# Altium PCB 24RC.PcbDoc
Units mm, origin at the board's own origin, x right, y up, seen from the top; angles counter-clockwise.
Board outline 50 x 120 mm, 2 copper layers (Top Layer, Bottom Layer); 168 components, 0 nets, 336 pads, 96 vias.
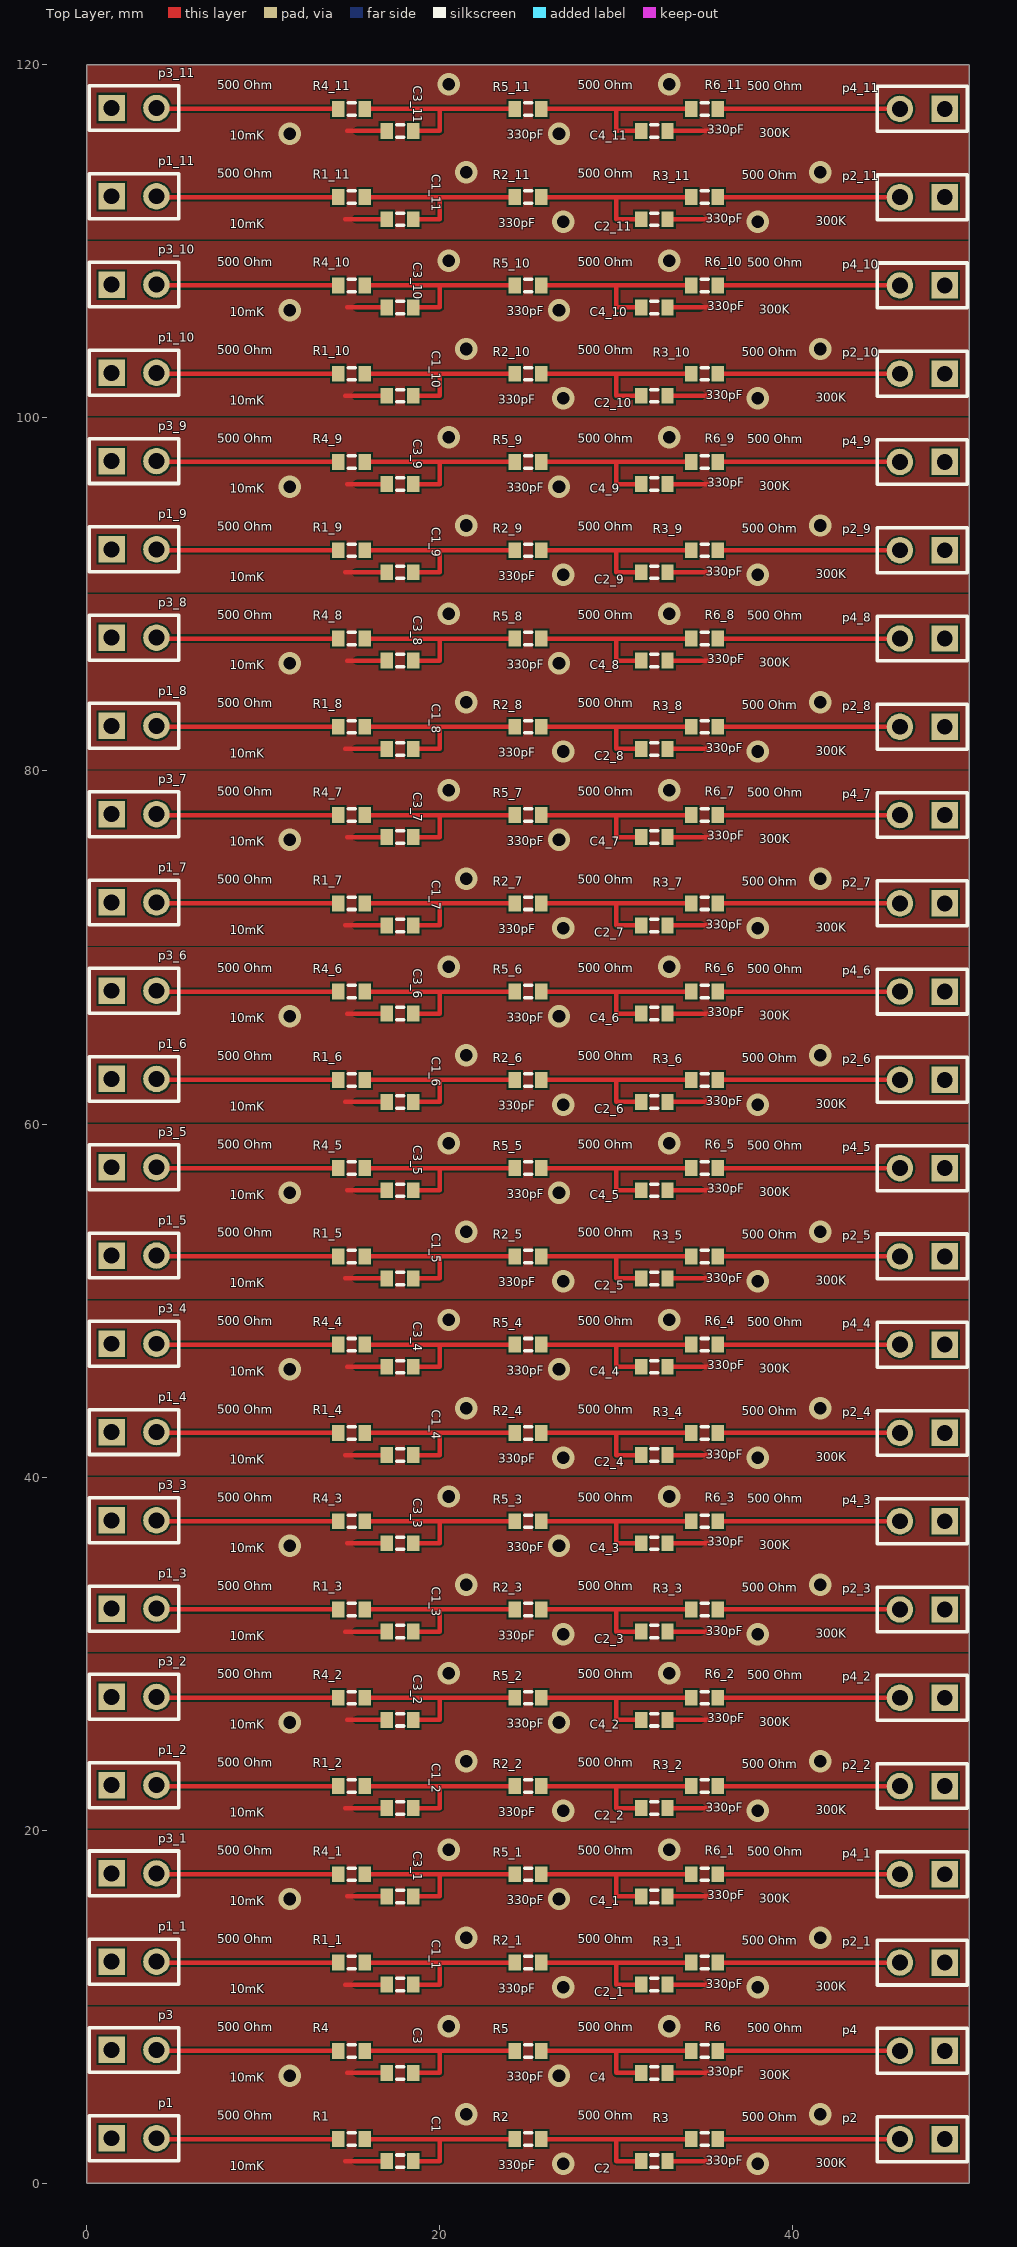
[diagram p0: Top Layer view]
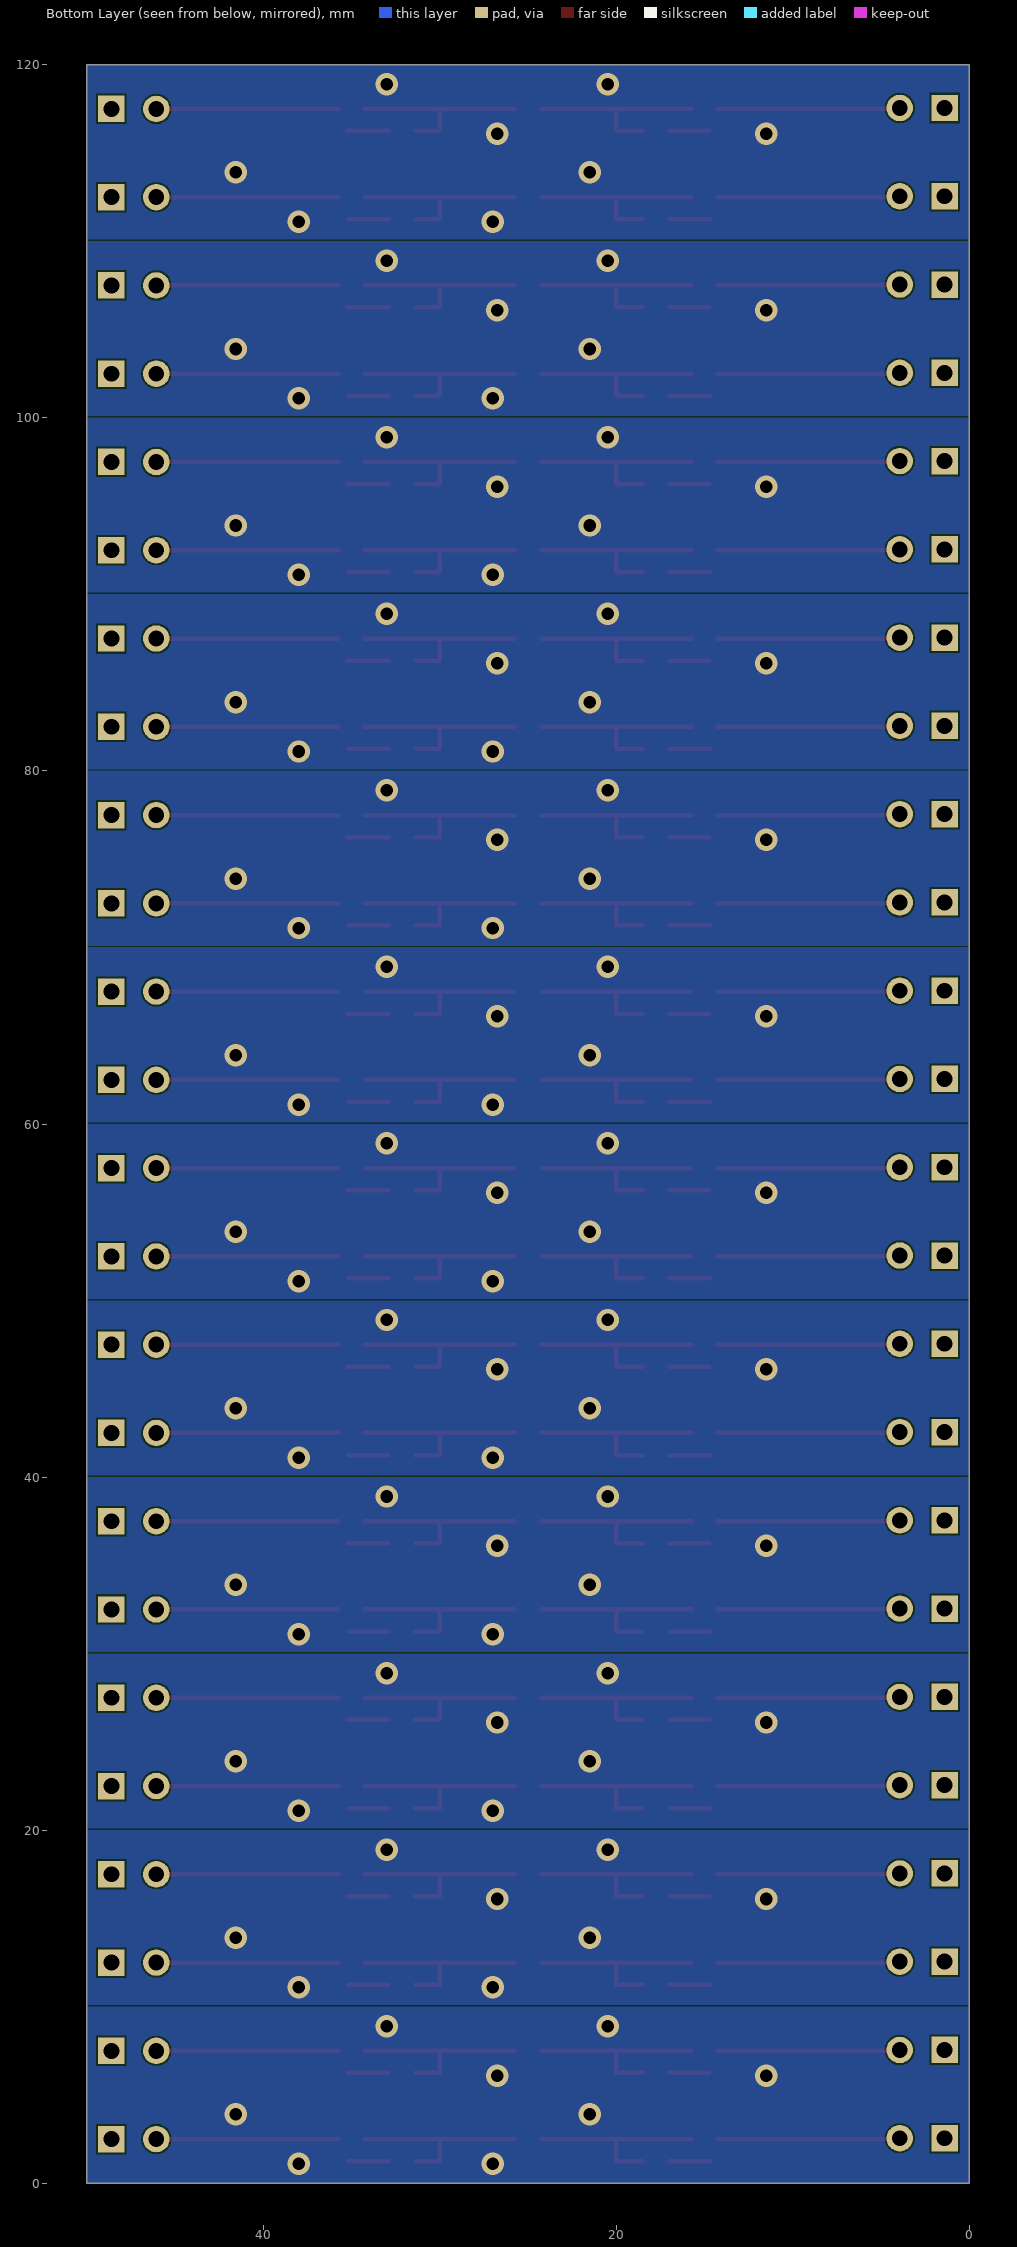
[diagram p1: Bottom Layer view, seen from below]

## Layer stack, top to bottom
Top Solder: solder mask 0.0102, Solder Resist, Dk 3.5
Top Layer: signal copper 0.0356
Dielectric 1: dielectric 0.32, FR-4, Dk 4.8
Bottom Layer: signal copper 0.0356
Bottom Solder: solder mask 0.0102, Solder Resist, Dk 3.5

## Board outline
0,0 0,120 50,120 50,0

## Design rules (kind name [scope] priority, off if disabled: settings)
Clearance "Stitching No Net" [IsStitchingVia and InNet('No Net') vs (IsVia and (Not IsStitchingVia)) Or IsPad] p1: gap=0.127 ignorepadtopadclearanceinfootprint=FALSE
Clearance [All] p2: gap=0.1 ignorepadtopadclearanceinfootprint=FALSE
PolygonConnect [All] p1: connectstyle=Relief reliefconductorwidth=0.254 reliefentries=4 polygonreliefangle="90 Angle" airgapwidth=0.254
RoutingVias [All] p1: holewidth=0.711 width=1.27 viastyle="Through Hole" minholewidth=0.711 minwidth=1.27 maxholewidth=0.711 maxwidth=1.27
SolderMaskExpansion [All] p1: expansion=0.102
Width [All] p1: maxlimit=0.254 minlimit=0.254 preferedwidth=0.254
30 further rules are at their usual default settings.

## Components (designator, comment, footprint, x,y, rotation, side; value= is the part's Value field where it differs from the comment)
C1 "Comment" J1-0603 17.75,1.25 r180 top
C1_1 "Comment" J1-0603 17.75,11.25 r180 top
C1_2 "Comment" J1-0603 17.75,21.25 r180 top
C1_3 "Comment" J1-0603 17.75,31.25 r180 top
C1_4 "Comment" J1-0603 17.75,41.25 r180 top
C1_5 "Comment" J1-0603 17.75,51.25 r180 top
C1_6 "Comment" J1-0603 17.75,61.25 r180 top
C1_7 "Comment" J1-0603 17.75,71.25 r180 top
C1_8 "Comment" J1-0603 17.75,81.25 r180 top
C1_9 "Comment" J1-0603 17.75,91.25 r180 top
C1_10 "Comment" J1-0603 17.75,101.25 r180 top
C1_11 "Comment" J1-0603 17.75,111.25 r180 top
C2 "Comment" J1-0603 32.15,1.25 r0 top
C2_1 "Comment" J1-0603 32.15,11.25 r0 top
C2_2 "Comment" J1-0603 32.15,21.25 r0 top
C2_3 "Comment" J1-0603 32.15,31.25 r0 top
C2_4 "Comment" J1-0603 32.15,41.25 r0 top
C2_5 "Comment" J1-0603 32.15,51.25 r0 top
C2_6 "Comment" J1-0603 32.15,61.25 r0 top
C2_7 "Comment" J1-0603 32.15,71.25 r0 top
C2_8 "Comment" J1-0603 32.15,81.25 r0 top
C2_9 "Comment" J1-0603 32.15,91.25 r0 top
C2_10 "Comment" J1-0603 32.15,101.25 r0 top
C2_11 "Comment" J1-0603 32.15,111.25 r0 top
C3 "Comment" J1-0603 17.75,6.25 r180 top
C3_1 "Comment" J1-0603 17.75,16.25 r180 top
C3_2 "Comment" J1-0603 17.75,26.25 r180 top
C3_3 "Comment" J1-0603 17.75,36.25 r180 top
C3_4 "Comment" J1-0603 17.75,46.25 r180 top
C3_5 "Comment" J1-0603 17.75,56.25 r180 top
C3_6 "Comment" J1-0603 17.75,66.25 r180 top
C3_7 "Comment" J1-0603 17.75,76.25 r180 top
C3_8 "Comment" J1-0603 17.75,86.25 r180 top
C3_9 "Comment" J1-0603 17.75,96.25 r180 top
C3_10 "Comment" J1-0603 17.75,106.25 r180 top
C3_11 "Comment" J1-0603 17.75,116.25 r180 top
C4 "Comment" J1-0603 32.15,6.25 r0 top
C4_1 "Comment" J1-0603 32.15,16.25 r0 top
C4_2 "Comment" J1-0603 32.15,26.25 r0 top
C4_3 "Comment" J1-0603 32.15,36.25 r0 top
C4_4 "Comment" J1-0603 32.15,46.25 r0 top
C4_5 "Comment" J1-0603 32.15,56.25 r0 top
C4_6 "Comment" J1-0603 32.15,66.25 r0 top
C4_7 "Comment" J1-0603 32.15,76.25 r0 top
C4_8 "Comment" J1-0603 32.15,86.25 r0 top
C4_9 "Comment" J1-0603 32.15,96.25 r0 top
C4_10 "Comment" J1-0603 32.15,106.25 r0 top
C4_11 "Comment" J1-0603 32.15,116.25 r0 top
p1 "Comment" HDR1X2 1.41,2.55 r0 top
p1_1 "Comment" HDR1X2 1.41,12.55 r0 top
p1_2 "Comment" HDR1X2 1.41,22.55 r0 top
p1_3 "Comment" HDR1X2 1.41,32.55 r0 top
p1_4 "Comment" HDR1X2 1.41,42.55 r0 top
p1_5 "Comment" HDR1X2 1.41,52.55 r0 top
p1_6 "Comment" HDR1X2 1.41,62.55 r0 top
p1_7 "Comment" HDR1X2 1.41,72.55 r0 top
p1_8 "Comment" HDR1X2 1.41,82.55 r0 top
p1_9 "Comment" HDR1X2 1.41,92.55 r0 top
p1_10 "Comment" HDR1X2 1.41,102.55 r0 top
p1_11 "Comment" HDR1X2 1.41,112.55 r0 top
p2 "Comment" HDR1X2 48.6,2.5 r180 top
p2_1 "Comment" HDR1X2 48.6,12.5 r180 top
p2_2 "Comment" HDR1X2 48.6,22.5 r180 top
p2_3 "Comment" HDR1X2 48.6,32.5 r180 top
p2_4 "Comment" HDR1X2 48.6,42.5 r180 top
p2_5 "Comment" HDR1X2 48.6,52.5 r180 top
p2_6 "Comment" HDR1X2 48.6,62.5 r180 top
p2_7 "Comment" HDR1X2 48.6,72.5 r180 top
p2_8 "Comment" HDR1X2 48.6,82.5 r180 top
p2_9 "Comment" HDR1X2 48.6,92.5 r180 top
p2_10 "Comment" HDR1X2 48.6,102.5 r180 top
p2_11 "Comment" HDR1X2 48.6,112.5 r180 top
p3 "Comment" HDR1X2 1.41,7.55 r0 top
p3_1 "Comment" HDR1X2 1.41,17.55 r0 top
p3_2 "Comment" HDR1X2 1.41,27.55 r0 top
p3_3 "Comment" HDR1X2 1.41,37.55 r0 top
p3_4 "Comment" HDR1X2 1.41,47.55 r0 top
p3_5 "Comment" HDR1X2 1.41,57.55 r0 top
p3_6 "Comment" HDR1X2 1.41,67.55 r0 top
p3_7 "Comment" HDR1X2 1.41,77.55 r0 top
p3_8 "Comment" HDR1X2 1.41,87.55 r0 top
p3_9 "Comment" HDR1X2 1.41,97.55 r0 top
p3_10 "Comment" HDR1X2 1.41,107.55 r0 top
p3_11 "Comment" HDR1X2 1.41,117.55 r0 top
p4 "Comment" HDR1X2 48.6,7.5 r180 top
p4_1 "Comment" HDR1X2 48.6,17.5 r180 top
p4_2 "Comment" HDR1X2 48.6,27.5 r180 top
p4_3 "Comment" HDR1X2 48.6,37.5 r180 top
p4_4 "Comment" HDR1X2 48.6,47.5 r180 top
p4_5 "Comment" HDR1X2 48.6,57.5 r180 top
p4_6 "Comment" HDR1X2 48.6,67.5 r180 top
p4_7 "Comment" HDR1X2 48.6,77.5 r180 top
p4_8 "Comment" HDR1X2 48.6,87.5 r180 top
p4_9 "Comment" HDR1X2 48.6,97.5 r180 top
p4_10 "Comment" HDR1X2 48.6,107.5 r180 top
p4_11 "Comment" HDR1X2 48.6,117.5 r180 top
R1 "Comment" J1-0603 15,2.5 r0 top
R1_1 "Comment" J1-0603 15,12.5 r0 top
R1_2 "Comment" J1-0603 15,22.5 r0 top
R1_3 "Comment" J1-0603 15,32.5 r0 top
R1_4 "Comment" J1-0603 15,42.5 r0 top
R1_5 "Comment" J1-0603 15,52.5 r0 top
R1_6 "Comment" J1-0603 15,62.5 r0 top
R1_7 "Comment" J1-0603 15,72.5 r0 top
R1_8 "Comment" J1-0603 15,82.5 r0 top
R1_9 "Comment" J1-0603 15,92.5 r0 top
R1_10 "Comment" J1-0603 15,102.5 r0 top
R1_11 "Comment" J1-0603 15,112.5 r0 top
R2 "Comment" J1-0603 25,2.5 r0 top
R2_1 "Comment" J1-0603 25,12.5 r0 top
R2_2 "Comment" J1-0603 25,22.5 r0 top
R2_3 "Comment" J1-0603 25,32.5 r0 top
R2_4 "Comment" J1-0603 25,42.5 r0 top
R2_5 "Comment" J1-0603 25,52.5 r0 top
R2_6 "Comment" J1-0603 25,62.5 r0 top
R2_7 "Comment" J1-0603 25,72.5 r0 top
R2_8 "Comment" J1-0603 25,82.5 r0 top
R2_9 "Comment" J1-0603 25,92.5 r0 top
R2_10 "Comment" J1-0603 25,102.5 r0 top
R2_11 "Comment" J1-0603 25,112.5 r0 top
R3 "Comment" J1-0603 35,2.5 r0 top
R3_1 "Comment" J1-0603 35,12.5 r0 top
R3_2 "Comment" J1-0603 35,22.5 r0 top
R3_3 "Comment" J1-0603 35,32.5 r0 top
R3_4 "Comment" J1-0603 35,42.5 r0 top
R3_5 "Comment" J1-0603 35,52.5 r0 top
R3_6 "Comment" J1-0603 35,62.5 r0 top
R3_7 "Comment" J1-0603 35,72.5 r0 top
R3_8 "Comment" J1-0603 35,82.5 r0 top
R3_9 "Comment" J1-0603 35,92.5 r0 top
R3_10 "Comment" J1-0603 35,102.5 r0 top
R3_11 "Comment" J1-0603 35,112.5 r0 top
R4 "Comment" J1-0603 15,7.5 r0 top
R4_1 "Comment" J1-0603 15,17.5 r0 top
R4_2 "Comment" J1-0603 15,27.5 r0 top
R4_3 "Comment" J1-0603 15,37.5 r0 top
R4_4 "Comment" J1-0603 15,47.5 r0 top
R4_5 "Comment" J1-0603 15,57.5 r0 top
R4_6 "Comment" J1-0603 15,67.5 r0 top
R4_7 "Comment" J1-0603 15,77.5 r0 top
R4_8 "Comment" J1-0603 15,87.5 r0 top
R4_9 "Comment" J1-0603 15,97.5 r0 top
R4_10 "Comment" J1-0603 15,107.5 r0 top
R4_11 "Comment" J1-0603 15,117.5 r0 top
R5 "Comment" J1-0603 25,7.5 r0 top
R5_1 "Comment" J1-0603 25,17.5 r0 top
R5_2 "Comment" J1-0603 25,27.5 r0 top
R5_3 "Comment" J1-0603 25,37.5 r0 top
R5_4 "Comment" J1-0603 25,47.5 r0 top
R5_5 "Comment" J1-0603 25,57.5 r0 top
R5_6 "Comment" J1-0603 25,67.5 r0 top
R5_7 "Comment" J1-0603 25,77.5 r0 top
R5_8 "Comment" J1-0603 25,87.5 r0 top
R5_9 "Comment" J1-0603 25,97.5 r0 top
R5_10 "Comment" J1-0603 25,107.5 r0 top
R5_11 "Comment" J1-0603 25,117.5 r0 top
R6 "Comment" J1-0603 35,7.5 r0 top
R6_1 "Comment" J1-0603 35,17.5 r0 top
R6_2 "Comment" J1-0603 35,27.5 r0 top
R6_3 "Comment" J1-0603 35,37.5 r0 top
R6_4 "Comment" J1-0603 35,47.5 r0 top
R6_5 "Comment" J1-0603 35,57.5 r0 top
R6_6 "Comment" J1-0603 35,67.5 r0 top
R6_7 "Comment" J1-0603 35,77.5 r0 top
R6_8 "Comment" J1-0603 35,87.5 r0 top
R6_9 "Comment" J1-0603 35,97.5 r0 top
R6_10 "Comment" J1-0603 35,107.5 r0 top
R6_11 "Comment" J1-0603 35,117.5 r0 top

## Footprints (in the part's own frame and the unit in brackets; to place one, negate y for a bottom-side part, rotate by r counter-clockwise, add the part's x,y. Pads: shape width x height; smd on the part's side, far side on the other; paste and mask are expansions set on the pad)
HDR1X2 [mm] "Connector; Header; 2 Position"
  rect 1.5x1.5 hole 0.9: 1(0,0)
  round 1.5 hole 0.9: 2(2.54,0)
  silkscreen extent -1.27,-1.27 3.81,1.27
J1-0603 [mm] "Chip Resistor, Body 1.6x0.8mm, IPC High Density"
  rect 0.7x0.9 smd: 1(-0.75,0) 2(0.75,0)
  silkscreen extent -0.2,-0.35 0.2,0.35, body extent -0.85,-0.48 0.85,0.48, height 0.9

## Via types
v1: diameter 1.27, hole 0.711, Top Layer to Bottom Layer, 96 vias

## Nets (pads, with @x,y where several pads share a name; then routed paths per layer and width w, separated by ;. In a path a pad name is that pad's centre, name@x,y a point inside that pad or via, vN(x,y) a via of type N, cw(c..) or ccw(c..) an arc to the next point about the centre after c; other vN are vias at no path point)
pads on no net: C1.1 C1.2 C1_1.1 C1_1.2 C1_2.1 C1_2.2 C1_3.1 C1_3.2 C1_4.1 C1_4.2 C1_5.1 C1_5.2 C1_6.1 C1_6.2 C1_7.1 C1_7.2 C1_8.1 C1_8.2 C1_9.1 C1_9.2 C1_10.1 C1_10.2 C1_11.1 C1_11.2 C2.1 C2.2 C2_1.1 C2_1.2 C2_2.1 C2_2.2 C2_3.1 C2_3.2 C2_4.1 C2_4.2 C2_5.1 C2_5.2 C2_6.1 C2_6.2 C2_7.1 C2_7.2 C2_8.1 C2_8.2 C2_9.1 C2_9.2 C2_10.1 C2_10.2 C2_11.1 C2_11.2 C3.1 C3.2 C3_1.1 C3_1.2 C3_2.1 C3_2.2 C3_3.1 C3_3.2 C3_4.1 C3_4.2 C3_5.1 C3_5.2 C3_6.1 C3_6.2 C3_7.1 C3_7.2 C3_8.1 C3_8.2 C3_9.1 C3_9.2 C3_10.1 C3_10.2 C3_11.1 C3_11.2 C4.1 C4.2 C4_1.1 C4_1.2 C4_2.1 C4_2.2 C4_3.1 C4_3.2 C4_4.1 C4_4.2 C4_5.1 C4_5.2 C4_6.1 C4_6.2 C4_7.1 C4_7.2 C4_8.1 C4_8.2 C4_9.1 C4_9.2 C4_10.1 C4_10.2 C4_11.1 C4_11.2 p1.1 p1.2 p1_1.1 p1_1.2 p1_2.1 p1_2.2 p1_3.1 p1_3.2 p1_4.1 p1_4.2 p1_5.1 p1_5.2 p1_6.1 p1_6.2 p1_7.1 p1_7.2 p1_8.1 p1_8.2 p1_9.1 p1_9.2 p1_10.1 p1_10.2 p1_11.1 p1_11.2 p2.1 p2.2 p2_1.1 p2_1.2 p2_2.1 p2_2.2 p2_3.1 p2_3.2 p2_4.1 p2_4.2 p2_5.1 p2_5.2 p2_6.1 p2_6.2 p2_7.1 p2_7.2 p2_8.1 p2_8.2 p2_9.1 p2_9.2 p2_10.1 p2_10.2 p2_11.1 p2_11.2 p3.1 p3.2 p3_1.1 p3_1.2 p3_2.1 p3_2.2 p3_3.1 p3_3.2 p3_4.1 p3_4.2 p3_5.1 p3_5.2 p3_6.1 p3_6.2 p3_7.1 p3_7.2 p3_8.1 p3_8.2 p3_9.1 p3_9.2 p3_10.1 p3_10.2 p3_11.1 p3_11.2 p4.1 p4.2 p4_1.1 p4_1.2 p4_2.1 p4_2.2 p4_3.1 p4_3.2 p4_4.1 p4_4.2 p4_5.1 p4_5.2 p4_6.1 p4_6.2 p4_7.1 p4_7.2 p4_8.1 p4_8.2 p4_9.1 p4_9.2 p4_10.1 p4_10.2 p4_11.1 p4_11.2 R1.1 R1.2 R1_1.1 R1_1.2 R1_2.1 R1_2.2 R1_3.1 R1_3.2 R1_4.1 R1_4.2 R1_5.1 R1_5.2 R1_6.1 R1_6.2 R1_7.1 R1_7.2 R1_8.1 R1_8.2 R1_9.1 R1_9.2 R1_10.1 R1_10.2 R1_11.1 R1_11.2 R2.1 R2.2 R2_1.1 R2_1.2 R2_2.1 R2_2.2 R2_3.1 R2_3.2 R2_4.1 R2_4.2 R2_5.1 R2_5.2 R2_6.1 R2_6.2 R2_7.1 R2_7.2 R2_8.1 R2_8.2 R2_9.1 R2_9.2 R2_10.1 R2_10.2 R2_11.1 R2_11.2 R3.1 R3.2 R3_1.1 R3_1.2 R3_2.1 R3_2.2 R3_3.1 R3_3.2 R3_4.1 R3_4.2 R3_5.1 R3_5.2 R3_6.1 R3_6.2 R3_7.1 R3_7.2 R3_8.1 R3_8.2 R3_9.1 R3_9.2 R3_10.1 R3_10.2 R3_11.1 R3_11.2 R4.1 R4.2 R4_1.1 R4_1.2 R4_2.1 R4_2.2 R4_3.1 R4_3.2 R4_4.1 R4_4.2 R4_5.1 R4_5.2 R4_6.1 R4_6.2 R4_7.1 R4_7.2 R4_8.1 R4_8.2 R4_9.1 R4_9.2 R4_10.1 R4_10.2 R4_11.1 R4_11.2 R5.1 R5.2 R5_1.1 R5_1.2 R5_2.1 R5_2.2 R5_3.1 R5_3.2 R5_4.1 R5_4.2 R5_5.1 R5_5.2 R5_6.1 R5_6.2 R5_7.1 R5_7.2 R5_8.1 R5_8.2 R5_9.1 R5_9.2 R5_10.1 R5_10.2 R5_11.1 R5_11.2 R6.1 R6.2 R6_1.1 R6_1.2 R6_2.1 R6_2.2 R6_3.1 R6_3.2 R6_4.1 R6_4.2 R6_5.1 R6_5.2 R6_6.1 R6_6.2 R6_7.1 R6_7.2 R6_8.1 R6_8.2 R6_9.1 R6_9.2 R6_10.1 R6_10.2 R6_11.1 R6_11.2
copper on no net: | length 1146.8
  Top Layer w0.254: 4.05,2.5 14.3,2.5 ; 4.05,7.5 14.3,7.5 ; 4.05,12.5 14.3,12.5 ; 4.05,17.5 14.3,17.5 ; 4.05,22.5 14.3,22.5 ; 4.05,27.5 14.3,27.5 ; 4.05,32.5 14.3,32.5 ; 4.05,37.5 14.3,37.5 ; 4.05,42.5 14.3,42.5 ; 4.05,47.5 14.3,47.5 ; 4.05,52.5 14.3,52.5 ; 4.05,57.5 14.3,57.5 ; 4.05,62.5 14.3,62.5 ; 4.05,67.5 14.3,67.5 ; 4.05,72.5 14.3,72.5 ; 4.05,77.5 14.3,77.5 ; 4.05,82.5 14.3,82.5 ; 4.05,87.5 14.3,87.5 ; 4.05,92.5 14.3,92.5 ; 4.05,97.5 14.3,97.5 ; 4.05,102.5 14.3,102.5 ; 4.05,107.5 14.3,107.5 ; 4.05,112.5 14.3,112.5 ; 4.05,117.5 14.3,117.5 ; 14.65,1.25 15.25,1.25 15.75,1.25 16.2,1.25 17,1.25 ; 14.65,11.25 15.25,11.25 15.75,11.25 16.2,11.25 17,11.25 ; 14.65,21.25 15.25,21.25 15.75,21.25 16.2,21.25 17,21.25 ; 14.65,31.25 15.25,31.25 15.75,31.25 16.2,31.25 17,31.25 ; 14.65,41.25 15.25,41.25 15.75,41.25 16.2,41.25 17,41.25 ; 14.65,51.25 15.25,51.25 15.75,51.25 16.2,51.25 17,51.25 ; 14.65,61.25 15.25,61.25 15.75,61.25 16.2,61.25 17,61.25 ; 14.65,71.25 15.25,71.25 15.75,71.25 16.2,71.25 17,71.25 ; 14.65,81.25 15.25,81.25 15.75,81.25 16.2,81.25 17,81.25 ; 14.65,91.25 15.25,91.25 15.75,91.25 16.2,91.25 17,91.25 ; 14.65,101.25 15.25,101.25 15.75,101.25 16.2,101.25 17,101.25 ; 14.65,111.25 15.25,111.25 15.75,111.25 16.2,111.25 17,111.25 ; 14.75,6.25 15.3,6.25 15.7,6.25 16.2,6.25 17,6.25 ; 14.75,16.25 15.3,16.25 15.7,16.25 16.2,16.25 17,16.25 ; 14.75,26.25 15.3,26.25 15.7,26.25 16.2,26.25 17,26.25 ; 14.75,36.25 15.3,36.25 15.7,36.25 16.2,36.25 17,36.25 ; 14.75,46.25 15.3,46.25 15.7,46.25 16.2,46.25 17,46.25 ; 14.75,56.25 15.3,56.25 15.7,56.25 16.2,56.25 17,56.25 ; 14.75,66.25 15.3,66.25 15.7,66.25 16.2,66.25 17,66.25 ; 14.75,76.25 15.3,76.25 15.7,76.25 16.2,76.25 17,76.25 ; 14.75,86.25 15.3,86.25 15.7,86.25 16.2,86.25 17,86.25 ; 14.75,96.25 15.3,96.25 15.7,96.25 16.2,96.25 17,96.25 ; 14.75,106.25 15.3,106.25 15.7,106.25 16.2,106.25 17,106.25 ; 14.75,116.25 15.3,116.25 15.7,116.25 16.2,116.25 17,116.25 ; 15.75,2.5 24.25,2.5 ; 15.75,7.5 24.25,7.5 ; 15.75,12.5 24.25,12.5 ; 15.75,17.5 24.25,17.5 ; 15.75,22.5 24.25,22.5 ; 15.75,27.5 24.25,27.5 ; 15.75,32.5 24.25,32.5 ; 15.75,37.5 24.25,37.5 ; 15.75,42.5 24.25,42.5 ; 15.75,47.5 24.25,47.5 ; 15.75,52.5 24.25,52.5 ; 15.75,57.5 24.25,57.5 ; 15.75,62.5 24.25,62.5 ; 15.75,67.5 24.25,67.5 ; 15.75,72.5 24.25,72.5 ; 15.75,77.5 24.25,77.5 ; 15.75,82.5 24.25,82.5 ; 15.75,87.5 24.25,87.5 ; 15.75,92.5 24.25,92.5 ; 15.75,97.5 24.25,97.5 ; 15.75,102.5 24.25,102.5 ; 15.75,107.5 24.25,107.5 ; 15.75,112.5 24.25,112.5 ; 15.75,117.5 24.25,117.5 ; 18.5,1.25 20,1.25 20,2.45 ; 18.5,6.25 20,6.25 20,7.45 ; 18.5,11.25 20,11.25 20,12.45 ; 18.5,16.25 20,16.25 20,17.45 ; 18.5,21.25 20,21.25 20,22.45 ; 18.5,26.25 20,26.25 20,27.45 ; 18.5,31.25 20,31.25 20,32.45 ; 18.5,36.25 20,36.25 20,37.45 ; 18.5,41.25 20,41.25 20,42.45 ; 18.5,46.25 20,46.25 20,47.45 ; 18.5,51.25 20,51.25 20,52.45 ; 18.5,56.25 20,56.25 20,57.45 ; 18.5,61.25 20,61.25 20,62.45 ; 18.5,66.25 20,66.25 20,67.45 ; 18.5,71.25 20,71.25 20,72.45 ; 18.5,76.25 20,76.25 20,77.45 ; 18.5,81.25 20,81.25 20,82.45 ; 18.5,86.25 20,86.25 20,87.45 ; 18.5,91.25 20,91.25 20,92.45 ; 18.5,96.25 20,96.25 20,97.45 ; 18.5,101.25 20,101.25 20,102.45 ; 18.5,106.25 20,106.25 20,107.45 ; 18.5,111.25 20,111.25 20,112.45 ; 18.5,116.25 20,116.25 20,117.45 ; 25.75,2.5 34.25,2.5 ; 25.75,7.5 34.25,7.5 ; 25.75,12.5 34.25,12.5 ; 25.75,17.5 34.25,17.5 ; 25.75,22.5 34.25,22.5 ; 25.75,27.5 34.25,27.5 ; 25.75,32.5 34.25,32.5 ; 25.75,37.5 34.25,37.5 ; 25.75,42.5 34.25,42.5 ; 25.75,47.5 34.25,47.5 ; 25.75,52.5 34.25,52.5 ; 25.75,57.5 34.25,57.5 ; 25.75,62.5 34.25,62.5 ; 25.75,67.5 34.25,67.5 ; 25.75,72.5 34.25,72.5 ; 25.75,77.5 34.25,77.5 ; 25.75,82.5 34.25,82.5 ; 25.75,87.5 34.25,87.5 ; 25.75,92.5 34.25,92.5 ; 25.75,97.5 34.25,97.5 ; 25.75,102.5 34.25,102.5 ; 25.75,107.5 34.25,107.5 ; 25.75,112.5 34.25,112.5 ; 25.75,117.5 34.25,117.5 ; 30,2.45 30,1.25 ; 30,7.45 30,6.25 ; 30,12.45 30,11.25 ; 30,17.45 30,16.25 ; 30,22.45 30,21.25 ; 30,27.45 30,26.25 ; 30,32.45 30,31.25 ; 30,37.45 30,36.25 ; 30,42.45 30,41.25 ; 30,47.45 30,46.25 ; 30,52.45 30,51.25 ; 30,57.45 30,56.25 ; 30,62.45 30,61.25 ; 30,67.45 30,66.25 ; 30,72.45 30,71.25 ; 30,77.45 30,76.25 ; 30,82.45 30,81.25 ; 30,87.45 30,86.25 ; 30,92.45 30,91.25 ; 30,97.45 30,96.25 ; 30,102.45 30,101.25 ; 30,107.45 30,106.25 ; 30,112.45 30,111.25 ; 30,117.45 30,116.25 ; 30.3,1.25 30,1.25 ; 30.3,6.25 30,6.25 ; 30.3,11.25 30,11.25 ; 30.3,16.25 30,16.25 ; 30.3,21.25 30,21.25 ; 30.3,26.25 30,26.25 ; 30.3,31.25 30,31.25 ; 30.3,36.25 30,36.25 ; 30.3,41.25 30,41.25 ; 30.3,46.25 30,46.25 ; 30.3,51.25 30,51.25 ; 30.3,56.25 30,56.25 ; 30.3,61.25 30,61.25 ; 30.3,66.25 30,66.25 ; 30.3,71.25 30,71.25 ; 30.3,76.25 30,76.25 ; 30.3,81.25 30,81.25 ; 30.3,86.25 30,86.25 ; 30.3,91.25 30,91.25 ; 30.3,96.25 30,96.25 ; 30.3,101.25 30,101.25 ; 30.3,106.25 30,106.25 ; 30.3,111.25 30,111.25 ; 30.3,116.25 30,116.25 ; 31.4,1.25 30,1.25 ; 31.4,6.25 30,6.25 ; 31.4,11.25 30,11.25 ; 31.4,16.25 30,16.25 ; 31.4,21.25 30,21.25 ; 31.4,26.25 30,26.25 ; 31.4,31.25 30,31.25 ; 31.4,36.25 30,36.25 ; 31.4,41.25 30,41.25 ; 31.4,46.25 30,46.25 ; 31.4,51.25 30,51.25 ; 31.4,56.25 30,56.25 ; 31.4,61.25 30,61.25 ; 31.4,66.25 30,66.25 ; 31.4,71.25 30,71.25 ; 31.4,76.25 30,76.25 ; 31.4,81.25 30,81.25 ; 31.4,86.25 30,86.25 ; 31.4,91.25 30,91.25 ; 31.4,96.25 30,96.25 ; 31.4,101.25 30,101.25 ; 31.4,106.25 30,106.25 ; 31.4,111.25 30,111.25 ; 31.4,116.25 30,116.25 ; 32.9,1.25 33.75,1.25 34.25,1.25 34.8,1.25 35.2,1.25 ; 32.9,6.25 33.75,6.25 34.2,6.25 34.75,6.25 35.25,6.25 ; 32.9,11.25 33.75,11.25 34.25,11.25 34.8,11.25 35.2,11.25 ; 32.9,16.25 33.75,16.25 34.2,16.25 34.75,16.25 35.25,16.25 ; 32.9,21.25 33.75,21.25 34.25,21.25 34.8,21.25 35.2,21.25 ; 32.9,26.25 33.75,26.25 34.2,26.25 34.75,26.25 35.25,26.25 ; 32.9,31.25 33.75,31.25 34.25,31.25 34.8,31.25 35.2,31.25 ; 32.9,36.25 33.75,36.25 34.2,36.25 34.75,36.25 35.25,36.25 ; 32.9,41.25 33.75,41.25 34.25,41.25 34.8,41.25 35.2,41.25 ; 32.9,46.25 33.75,46.25 34.2,46.25 34.75,46.25 35.25,46.25 ; 32.9,51.25 33.75,51.25 34.25,51.25 34.8,51.25 35.2,51.25 ; 32.9,56.25 33.75,56.25 34.2,56.25 34.75,56.25 35.25,56.25 ; 32.9,61.25 33.75,61.25 34.25,61.25 34.8,61.25 35.2,61.25 ; 32.9,66.25 33.75,66.25 34.2,66.25 34.75,66.25 35.25,66.25 ; 32.9,71.25 33.75,71.25 34.25,71.25 34.8,71.25 35.2,71.25 ; 32.9,76.25 33.75,76.25 34.2,76.25 34.75,76.25 35.25,76.25 ; 32.9,81.25 33.75,81.25 34.25,81.25 34.8,81.25 35.2,81.25 ; 32.9,86.25 33.75,86.25 34.2,86.25 34.75,86.25 35.25,86.25 ; 32.9,91.25 33.75,91.25 34.25,91.25 34.8,91.25 35.2,91.25 ; 32.9,96.25 33.75,96.25 34.2,96.25 34.75,96.25 35.25,96.25 ; 32.9,101.25 33.75,101.25 34.25,101.25 34.8,101.25 35.2,101.25 ; 32.9,106.25 33.75,106.25 34.2,106.25 34.75,106.25 35.25,106.25 ; 32.9,111.25 33.75,111.25 34.25,111.25 34.8,111.25 35.2,111.25 ; 32.9,116.25 33.75,116.25 34.2,116.25 34.75,116.25 35.25,116.25 ; 35.75,2.5 46.06,2.5 ; 35.75,7.5 46.06,7.5 ; 35.75,12.5 46.06,12.5 ; 35.75,17.5 46.06,17.5 ; 35.75,22.5 46.06,22.5 ; 35.75,27.5 46.06,27.5 ; 35.75,32.5 46.06,32.5 ; 35.75,37.5 46.06,37.5 ; 35.75,42.5 46.06,42.5 ; 35.75,47.5 46.06,47.5 ; 35.75,52.5 46.06,52.5 ; 35.75,57.5 46.06,57.5 ; 35.75,62.5 46.06,62.5 ; 35.75,67.5 46.06,67.5 ; 35.75,72.5 46.06,72.5 ; 35.75,77.5 46.06,77.5 ; 35.75,82.5 46.06,82.5 ; 35.75,87.5 46.06,87.5 ; 35.75,92.5 46.06,92.5 ; 35.75,97.5 46.06,97.5 ; 35.75,102.5 46.06,102.5 ; 35.75,107.5 46.06,107.5 ; 35.75,112.5 46.06,112.5 ; 35.75,117.5 46.06,117.5
  other v1: 27,1.1 38,1.1 21.5,3.9 41.55,3.9 11.5,6.1 26.75,6.1 20.5,8.9 33,8.9 27,11.1 38,11.1 21.5,13.9 41.55,13.9 11.5,16.1 26.75,16.1 20.5,18.9 33,18.9 27,21.1 38,21.1 21.5,23.9 41.55,23.9 11.5,26.1 26.75,26.1 20.5,28.9 33,28.9 27,31.1 38,31.1 21.5,33.9 41.55,33.9 11.5,36.1 26.75,36.1 20.5,38.9 33,38.9 27,41.1 38,41.1 21.5,43.9 41.55,43.9 11.5,46.1 26.75,46.1 20.5,48.9 33,48.9 27,51.1 38,51.1 21.5,53.9 41.55,53.9 11.5,56.1 26.75,56.1 20.5,58.9 33,58.9 27,61.1 38,61.1 21.5,63.9 41.55,63.9 11.5,66.1 26.75,66.1 20.5,68.9 33,68.9 27,71.1 38,71.1 21.5,73.9 41.55,73.9 11.5,76.1 26.75,76.1 20.5,78.9 33,78.9 27,81.1 38,81.1 21.5,83.9 41.55,83.9 11.5,86.1 26.75,86.1 20.5,88.9 33,88.9 27,91.1 38,91.1 21.5,93.9 41.55,93.9 11.5,96.1 26.75,96.1 20.5,98.9 33,98.9 27,101.1 38,101.1 21.5,103.9 41.55,103.9 11.5,106.1 26.75,106.1 20.5,108.9 33,108.9 27,111.1 38,111.1 21.5,113.9 41.55,113.9 11.5,116.1 26.75,116.1 20.5,118.9 33,118.9

## Polygon pours and split planes (outlines as drawn)
no net on Top Layer "Top Layer-No Net 6" (solid, pour order 1230): 13.75,114
no net on Top Layer "Top Layer-No Net 6" (solid, pour order 1228): 13.75,119
no net on Top Layer "Top Layer-No Net 24" (solid, pour order 1226): 0,110
no net on Top Layer "Top Layer-No Net 23" (solid, pour order 1224): 0,110 0,120 50,120 50,110
no net on Top Layer "Top Layer-No Net 6" (solid, pour order 1220): 13.75,104
no net on Top Layer "Top Layer-No Net 6" (solid, pour order 1218): 13.75,109
no net on Top Layer "Top Layer-No Net 24" (solid, pour order 1216): 0,100
no net on Top Layer "Top Layer-No Net 23" (solid, pour order 1214): 0,100 0,110 50,110 50,100
no net on Top Layer "Top Layer-No Net 6" (solid, pour order 1210): 13.75,94
no net on Top Layer "Top Layer-No Net 6" (solid, pour order 1208): 13.75,99
no net on Top Layer "Top Layer-No Net 24" (solid, pour order 1206): 0,90
no net on Top Layer "Top Layer-No Net 23" (solid, pour order 1204): 0,90 0,100 50,100 50,90
no net on Top Layer "Top Layer-No Net 6" (solid, pour order 1200): 13.75,84
no net on Top Layer "Top Layer-No Net 6" (solid, pour order 1198): 13.75,89
no net on Top Layer "Top Layer-No Net 24" (solid, pour order 1196): 0,80
no net on Top Layer "Top Layer-No Net 23" (solid, pour order 1194): 0,80 0,90 50,90 50,80
no net on Top Layer "Top Layer-No Net 6" (solid, pour order 1190): 13.75,74
no net on Top Layer "Top Layer-No Net 6" (solid, pour order 1188): 13.75,79
no net on Top Layer "Top Layer-No Net 24" (solid, pour order 1186): 0,70
no net on Top Layer "Top Layer-No Net 23" (solid, pour order 1184): 0,70 0,80 50,80 50,70
no net on Top Layer "Top Layer-No Net 6" (solid, pour order 1180): 13.75,64
no net on Top Layer "Top Layer-No Net 6" (solid, pour order 1178): 13.75,69
no net on Top Layer "Top Layer-No Net 24" (solid, pour order 1176): 0,60
no net on Top Layer "Top Layer-No Net 23" (solid, pour order 1174): 0,60 0,70 50,70 50,60
no net on Top Layer "Top Layer-No Net 6" (solid, pour order 1170): 13.75,54
no net on Top Layer "Top Layer-No Net 6" (solid, pour order 1168): 13.75,59
no net on Top Layer "Top Layer-No Net 24" (solid, pour order 1166): 0,50
no net on Top Layer "Top Layer-No Net 23" (solid, pour order 1164): 0,50 0,60 50,60 50,50
no net on Top Layer "Top Layer-No Net 6" (solid, pour order 1160): 13.75,44
no net on Top Layer "Top Layer-No Net 6" (solid, pour order 1158): 13.75,49
no net on Top Layer "Top Layer-No Net 24" (solid, pour order 1156): 0,40
no net on Top Layer "Top Layer-No Net 23" (solid, pour order 1154): 0,40 0,50 50,50 50,40
no net on Top Layer "Top Layer-No Net 6" (solid, pour order 1150): 13.75,34
no net on Top Layer "Top Layer-No Net 6" (solid, pour order 1148): 13.75,39
no net on Top Layer "Top Layer-No Net 24" (solid, pour order 1146): 0,30
no net on Top Layer "Top Layer-No Net 23" (solid, pour order 1144): 0,30 0,40 50,40 50,30
no net on Top Layer "Top Layer-No Net 6" (solid, pour order 1140): 13.75,24
no net on Top Layer "Top Layer-No Net 6" (solid, pour order 1138): 13.75,29
no net on Top Layer "Top Layer-No Net 24" (solid, pour order 1136): 0,20
no net on Top Layer "Top Layer-No Net 23" (solid, pour order 1134): 0,20 0,30 50,30 50,20
no net on Top Layer "Top Layer-No Net 6" (solid, pour order 1130): 13.75,14
no net on Top Layer "Top Layer-No Net 6" (solid, pour order 1128): 13.75,19
no net on Top Layer "Top Layer-No Net 24" (solid, pour order 1126): 0,10
no net on Top Layer "Top Layer-No Net 23" (solid, pour order 1124): 0,10 0,20 50,20 50,10
no net on Top Layer "Top Layer-No Net 23" (solid, pour order 900): 0,0 0,10 50,10 50,0
no net on Top Layer "Top Layer-No Net 24" (solid, pour order 902): 0,0
no net on Top Layer "Top Layer-No Net 6" (solid, pour order 366): 13.75,9
no net on Top Layer "Top Layer-No Net 6" (solid, pour order 72): 13.75,4
no net on Top Solder (solid): 7.5,113.6
no net on Top Solder (solid): 7.5,113.9
no net on Top Solder (solid): 7.5,118.9
no net on Top Solder (solid): 7.5,118.6
no net on Top Solder (solid): 7.5,103.6
no net on Top Solder (solid): 7.5,103.9
no net on Top Solder (solid): 7.5,108.9
no net on Top Solder (solid): 7.5,108.6
no net on Top Solder (solid): 7.5,93.6
no net on Top Solder (solid): 7.5,93.9
no net on Top Solder (solid): 7.5,98.9
no net on Top Solder (solid): 7.5,98.6
no net on Top Solder (solid): 7.5,83.6
no net on Top Solder (solid): 7.5,83.9
no net on Top Solder (solid): 7.5,88.9
no net on Top Solder (solid): 7.5,88.6
no net on Top Solder (solid): 7.5,73.6
no net on Top Solder (solid): 7.5,73.9
no net on Top Solder (solid): 7.5,78.9
no net on Top Solder (solid): 7.5,78.6
no net on Top Solder (solid): 7.5,63.6
no net on Top Solder (solid): 7.5,63.9
no net on Top Solder (solid): 7.5,68.9
no net on Top Solder (solid): 7.5,68.6
no net on Top Solder (solid): 7.5,53.6
no net on Top Solder (solid): 7.5,53.9
no net on Top Solder (solid): 7.5,58.9
no net on Top Solder (solid): 7.5,58.6
no net on Top Solder (solid): 7.5,43.6
no net on Top Solder (solid): 7.5,43.9
no net on Top Solder (solid): 7.5,48.9
no net on Top Solder (solid): 7.5,48.6
no net on Top Solder (solid): 7.5,33.6
no net on Top Solder (solid): 7.5,33.9
no net on Top Solder (solid): 7.5,38.9
no net on Top Solder (solid): 7.5,38.6
no net on Top Solder (solid): 7.5,23.6
no net on Top Solder (solid): 7.5,23.9
no net on Top Solder (solid): 7.5,28.9
no net on Top Solder (solid): 7.5,28.6
no net on Top Solder (solid): 7.5,13.6
no net on Top Solder (solid): 7.5,13.9
no net on Top Solder (solid): 7.5,18.9
no net on Top Solder (solid): 7.5,18.6
no net on Top Solder (solid): 7.5,8.6
no net on Top Solder (solid): 7.5,8.9
no net on Top Solder (solid): 7.5,3.9
no net on Top Solder (solid): 7.5,3.6
no net on Bottom Layer "Bottom Layer-No Net 11" (solid, pour order 1232): 0,110 0,120 50,120 50,110
no net on Bottom Layer "Bottom Layer-No Net 11" (solid, pour order 1222): 0,100 0,110 50,110 50,100
no net on Bottom Layer "Bottom Layer-No Net 11" (solid, pour order 1212): 0,90 0,100 50,100 50,90
no net on Bottom Layer "Bottom Layer-No Net 11" (solid, pour order 1202): 0,80 0,90 50,90 50,80
no net on Bottom Layer "Bottom Layer-No Net 11" (solid, pour order 1192): 0,70 0,80 50,80 50,70
no net on Bottom Layer "Bottom Layer-No Net 11" (solid, pour order 1182): 0,60 0,70 50,70 50,60
no net on Bottom Layer "Bottom Layer-No Net 11" (solid, pour order 1172): 0,50 0,60 50,60 50,50
no net on Bottom Layer "Bottom Layer-No Net 11" (solid, pour order 1162): 0,40 0,50 50,50 50,40
no net on Bottom Layer "Bottom Layer-No Net 11" (solid, pour order 1152): 0,30 0,40 50,40 50,30
no net on Bottom Layer "Bottom Layer-No Net 11" (solid, pour order 1142): 0,20 0,30 50,30 50,20
no net on Bottom Layer "Bottom Layer-No Net 11" (solid, pour order 1132): 0,10 0,20 50,20 50,10
no net on Bottom Layer "Bottom Layer-No Net 11" (solid, pour order 898): 0,0 0,10 50,10 50,0

## Silkscreen, mask and mechanical layers (free items; w line width, h text height)
Top Overlay:
  text "500 Ohm" at 7.4,118.6 h0.5
  text "500 Ohm" at 27.8,118.6 h0.5
  text "500 Ohm" at 37.4,118.55 h0.5
  text "330pF" at 35.15,116.1 h0.5
  text "300K" at 38.1,115.9 h0.5
  text "330pF" at 23.8,115.8 h0.5
  text "10mK" at 8.1,115.75 h0.5
  text "500 Ohm" at 7.4,113.6 h0.5
  text "500 Ohm" at 27.8,113.6 h0.5
  text "500 Ohm" at 37.1,113.5 h0.5
  text "330pF" at 35.05,111.05 h0.5
  text "300K" at 41.3,110.9 h0.5
  text "330pF" at 23.3,110.8 h0.5
  text "10mK" at 8.1,110.75 h0.5
  text "500 Ohm" at 7.4,108.6 h0.5
  text "500 Ohm" at 27.8,108.6 h0.5
  text "500 Ohm" at 37.4,108.55 h0.5
  text "330pF" at 35.15,106.1 h0.5
  text "300K" at 38.1,105.9 h0.5
  text "330pF" at 23.8,105.8 h0.5
  text "10mK" at 8.1,105.75 h0.5
  text "500 Ohm" at 7.4,103.6 h0.5
  text "500 Ohm" at 27.8,103.6 h0.5
  text "500 Ohm" at 37.1,103.5 h0.5
  text "330pF" at 35.05,101.05 h0.5
  text "300K" at 41.3,100.9 h0.5
  text "330pF" at 23.3,100.8 h0.5
  text "10mK" at 8.1,100.75 h0.5
  text "500 Ohm" at 7.4,98.6 h0.5
  text "500 Ohm" at 27.8,98.6 h0.5
  text "500 Ohm" at 37.4,98.55 h0.5
  text "330pF" at 35.15,96.1 h0.5
  text "300K" at 38.1,95.9 h0.5
  text "330pF" at 23.8,95.8 h0.5
  text "10mK" at 8.1,95.75 h0.5
  text "500 Ohm" at 7.4,93.6 h0.5
  text "500 Ohm" at 27.8,93.6 h0.5
  text "500 Ohm" at 37.1,93.5 h0.5
  text "330pF" at 35.05,91.05 h0.5
  text "300K" at 41.3,90.9 h0.5
  text "330pF" at 23.3,90.8 h0.5
  text "10mK" at 8.1,90.75 h0.5
  text "500 Ohm" at 7.4,88.6 h0.5
  text "500 Ohm" at 27.8,88.6 h0.5
  text "500 Ohm" at 37.4,88.55 h0.5
  text "330pF" at 35.15,86.1 h0.5
  text "300K" at 38.1,85.9 h0.5
  text "330pF" at 23.8,85.8 h0.5
  text "10mK" at 8.1,85.75 h0.5
  text "500 Ohm" at 7.4,83.6 h0.5
  text "500 Ohm" at 27.8,83.6 h0.5
  text "500 Ohm" at 37.1,83.5 h0.5
  text "330pF" at 35.05,81.05 h0.5
  text "300K" at 41.3,80.9 h0.5
  text "330pF" at 23.3,80.8 h0.5
  text "10mK" at 8.1,80.75 h0.5
  text "500 Ohm" at 7.4,78.6 h0.5
  text "500 Ohm" at 27.8,78.6 h0.5
  text "500 Ohm" at 37.4,78.55 h0.5
  text "330pF" at 35.15,76.1 h0.5
  text "300K" at 38.1,75.9 h0.5
  text "330pF" at 23.8,75.8 h0.5
  text "10mK" at 8.1,75.75 h0.5
  text "500 Ohm" at 7.4,73.6 h0.5
  text "500 Ohm" at 27.8,73.6 h0.5
  text "500 Ohm" at 37.1,73.5 h0.5
  text "330pF" at 35.05,71.05 h0.5
  text "300K" at 41.3,70.9 h0.5
  text "330pF" at 23.3,70.8 h0.5
  text "10mK" at 8.1,70.75 h0.5
  text "500 Ohm" at 7.4,68.6 h0.5
  text "500 Ohm" at 27.8,68.6 h0.5
  text "500 Ohm" at 37.4,68.55 h0.5
  text "330pF" at 35.15,66.1 h0.5
  text "300K" at 38.1,65.9 h0.5
  text "330pF" at 23.8,65.8 h0.5
  text "10mK" at 8.1,65.75 h0.5
  text "500 Ohm" at 7.4,63.6 h0.5
  text "500 Ohm" at 27.8,63.6 h0.5
  text "500 Ohm" at 37.1,63.5 h0.5
  text "330pF" at 35.05,61.05 h0.5
  text "300K" at 41.3,60.9 h0.5
  text "330pF" at 23.3,60.8 h0.5
  text "10mK" at 8.1,60.75 h0.5
  text "500 Ohm" at 7.4,58.6 h0.5
  text "500 Ohm" at 27.8,58.6 h0.5
  text "500 Ohm" at 37.4,58.55 h0.5
  text "330pF" at 35.15,56.1 h0.5
  text "300K" at 38.1,55.9 h0.5
  text "330pF" at 23.8,55.8 h0.5
  text "10mK" at 8.1,55.75 h0.5
  text "500 Ohm" at 7.4,53.6 h0.5
  text "500 Ohm" at 27.8,53.6 h0.5
  text "500 Ohm" at 37.1,53.5 h0.5
  text "330pF" at 35.05,51.05 h0.5
  text "300K" at 41.3,50.9 h0.5
  text "330pF" at 23.3,50.8 h0.5
  text "10mK" at 8.1,50.75 h0.5
  text "500 Ohm" at 7.4,48.6 h0.5
  text "500 Ohm" at 27.8,48.6 h0.5
  text "500 Ohm" at 37.4,48.55 h0.5
  text "330pF" at 35.15,46.1 h0.5
  text "300K" at 38.1,45.9 h0.5
  text "330pF" at 23.8,45.8 h0.5
  text "10mK" at 8.1,45.75 h0.5
  text "500 Ohm" at 7.4,43.6 h0.5
  text "500 Ohm" at 27.8,43.6 h0.5
  text "500 Ohm" at 37.1,43.5 h0.5
  text "330pF" at 35.05,41.05 h0.5
  text "300K" at 41.3,40.9 h0.5
  text "330pF" at 23.3,40.8 h0.5
  text "10mK" at 8.1,40.75 h0.5
  text "500 Ohm" at 7.4,38.6 h0.5
  text "500 Ohm" at 27.8,38.6 h0.5
  text "500 Ohm" at 37.4,38.55 h0.5
  text "330pF" at 35.15,36.1 h0.5
  text "300K" at 38.1,35.9 h0.5
  text "330pF" at 23.8,35.8 h0.5
  text "10mK" at 8.1,35.75 h0.5
  text "500 Ohm" at 7.4,33.6 h0.5
  text "500 Ohm" at 27.8,33.6 h0.5
  text "500 Ohm" at 37.1,33.5 h0.5
  text "330pF" at 35.05,31.05 h0.5
  text "300K" at 41.3,30.9 h0.5
  text "330pF" at 23.3,30.8 h0.5
  text "10mK" at 8.1,30.75 h0.5
  text "500 Ohm" at 7.4,28.6 h0.5
  text "500 Ohm" at 27.8,28.6 h0.5
  text "500 Ohm" at 37.4,28.55 h0.5
  text "330pF" at 35.15,26.1 h0.5
  text "300K" at 38.1,25.9 h0.5
  text "330pF" at 23.8,25.8 h0.5
  text "10mK" at 8.1,25.75 h0.5
  text "500 Ohm" at 7.4,23.6 h0.5
  text "500 Ohm" at 27.8,23.6 h0.5
  text "500 Ohm" at 37.1,23.5 h0.5
  text "330pF" at 35.05,21.05 h0.5
  text "300K" at 41.3,20.9 h0.5
  text "330pF" at 23.3,20.8 h0.5
  text "10mK" at 8.1,20.75 h0.5
  text "500 Ohm" at 7.4,18.6 h0.5
  text "500 Ohm" at 27.8,18.6 h0.5
  text "500 Ohm" at 37.4,18.55 h0.5
  text "330pF" at 35.15,16.1 h0.5
  text "300K" at 38.1,15.9 h0.5
  text "330pF" at 23.8,15.8 h0.5
  text "10mK" at 8.1,15.75 h0.5
  text "500 Ohm" at 7.4,13.6 h0.5
  text "500 Ohm" at 27.8,13.6 h0.5
  text "500 Ohm" at 37.1,13.5 h0.5
  text "330pF" at 35.05,11.05 h0.5
  text "300K" at 41.3,10.9 h0.5
  text "330pF" at 23.3,10.8 h0.5
  text "10mK" at 8.1,10.75 h0.5
  text "500 Ohm" at 7.4,8.6 h0.5
  text "500 Ohm" at 27.8,8.6 h0.5
  text "500 Ohm" at 37.4,8.55 h0.5
  text "330pF" at 35.15,6.1 h0.5
  text "300K" at 38.1,5.9 h0.5
  text "330pF" at 23.8,5.8 h0.5
  text "10mK" at 8.1,5.75 h0.5
  text "500 Ohm" at 7.4,3.6 h0.5
  text "500 Ohm" at 27.8,3.6 h0.5
  text "500 Ohm" at 37.1,3.5 h0.5
  text "330pF" at 35.05,1.05 h0.5
  text "300K" at 41.3,0.9 h0.5
  text "330pF" at 23.3,0.8 h0.5
  text "10mK" at 8.1,0.75 h0.5